# Altium PCB PCB.PcbDoc
Units mil, origin at the board's own origin, x right, y up, seen from the top; angles counter-clockwise.
Board outline 3350 x 2755 mil, 2 copper layers (Top Layer, Bottom Layer); 22 components, 24 nets, 95 pads, 26 vias.
Unrouted connection lines stored in the file: 1.
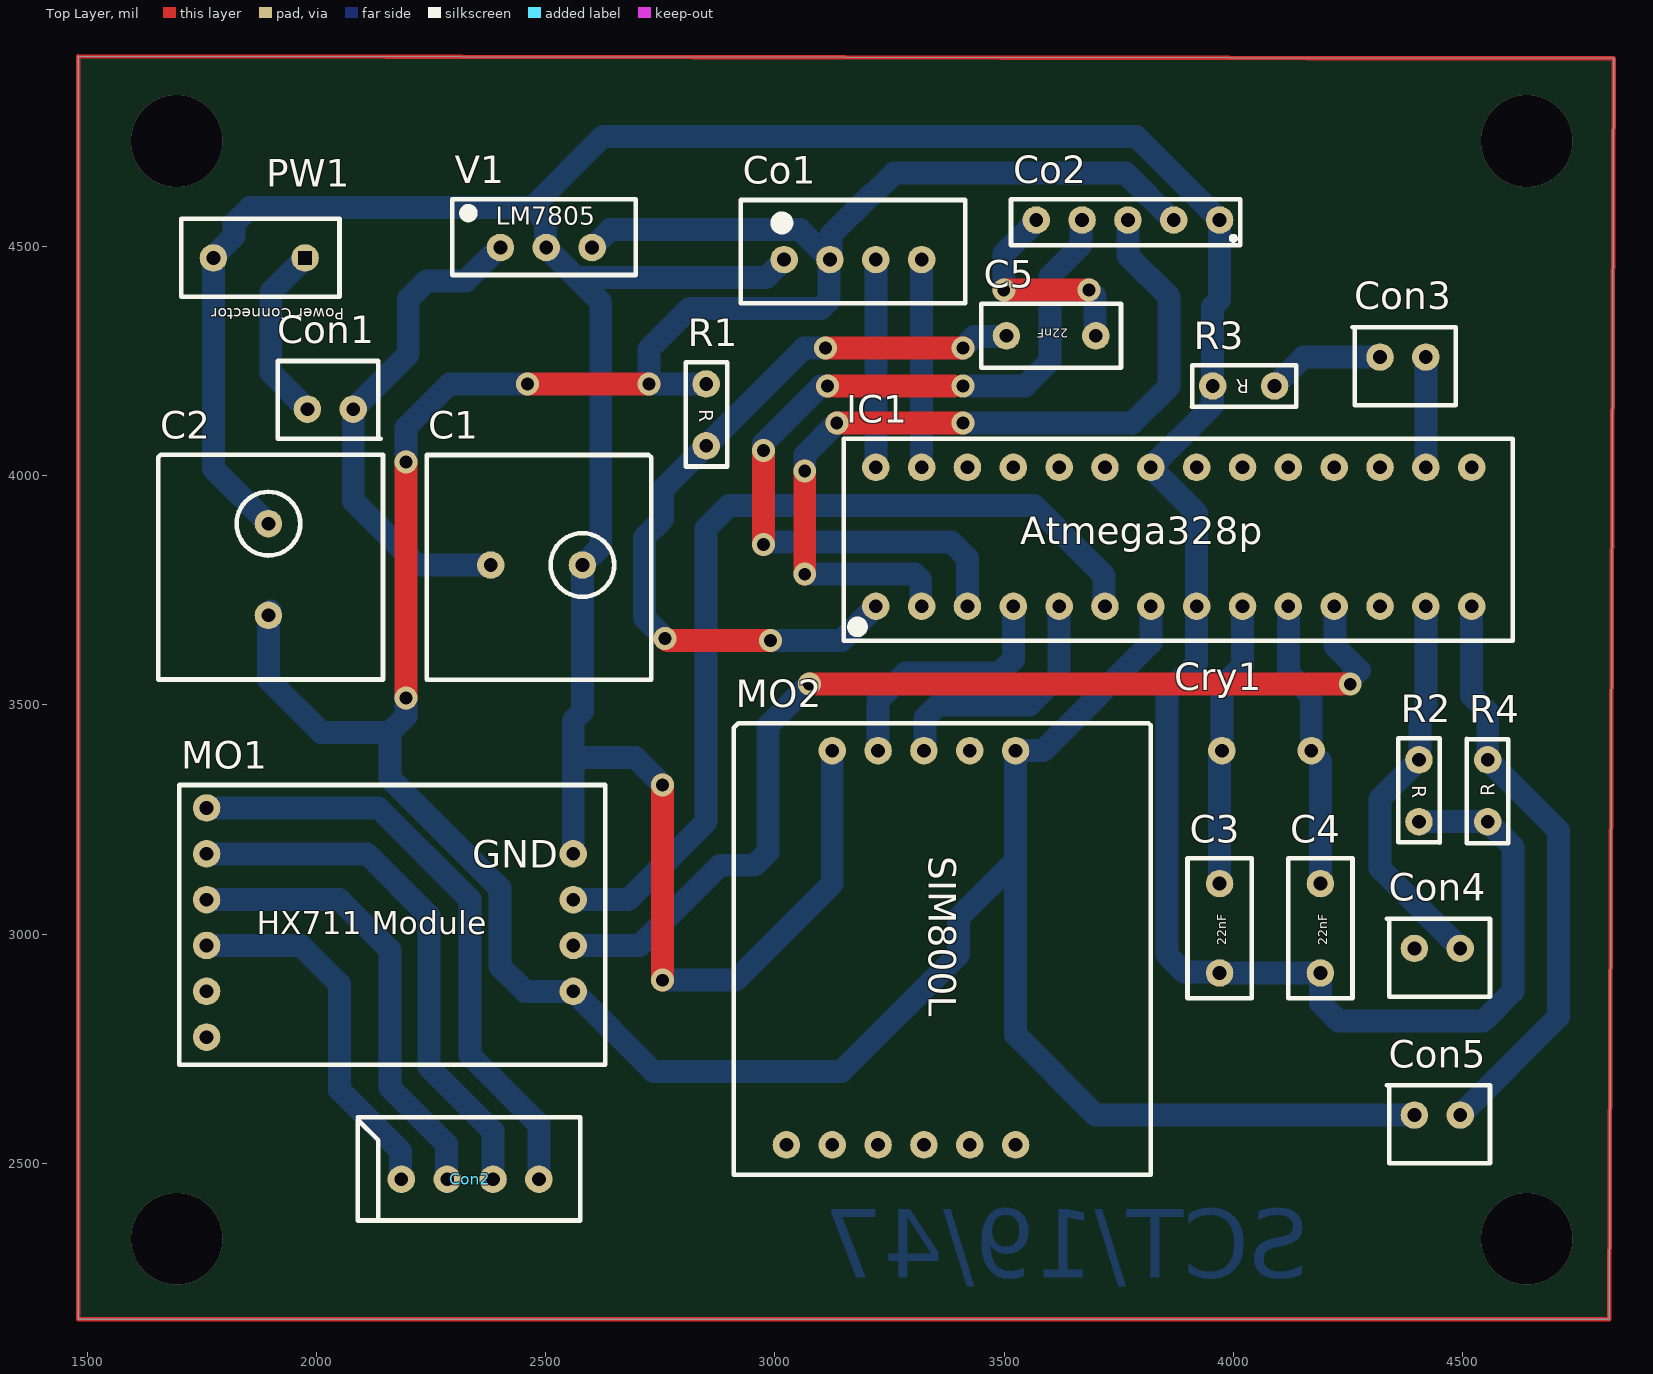
[diagram p0: Top Layer view]
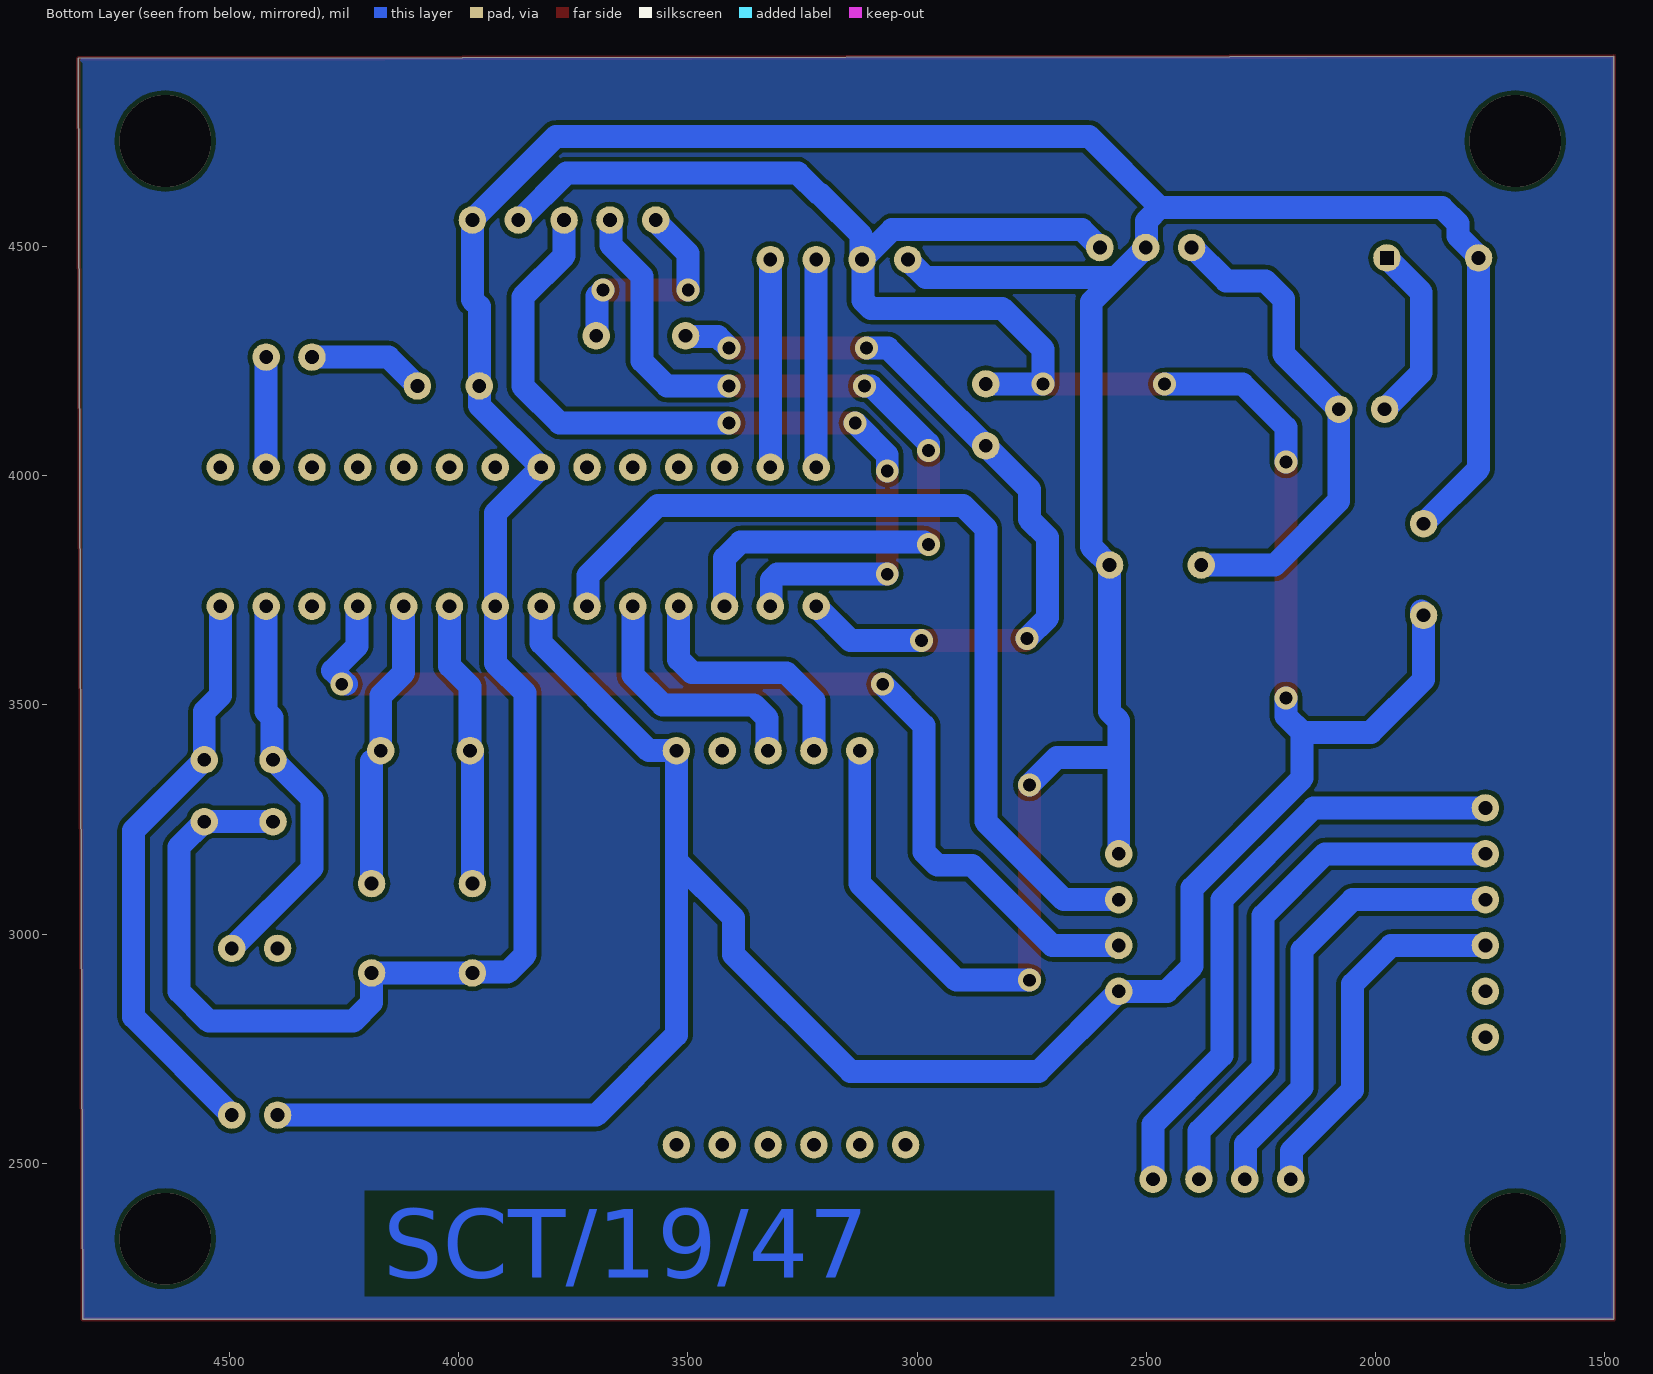
[diagram p1: Bottom Layer view, seen from below]
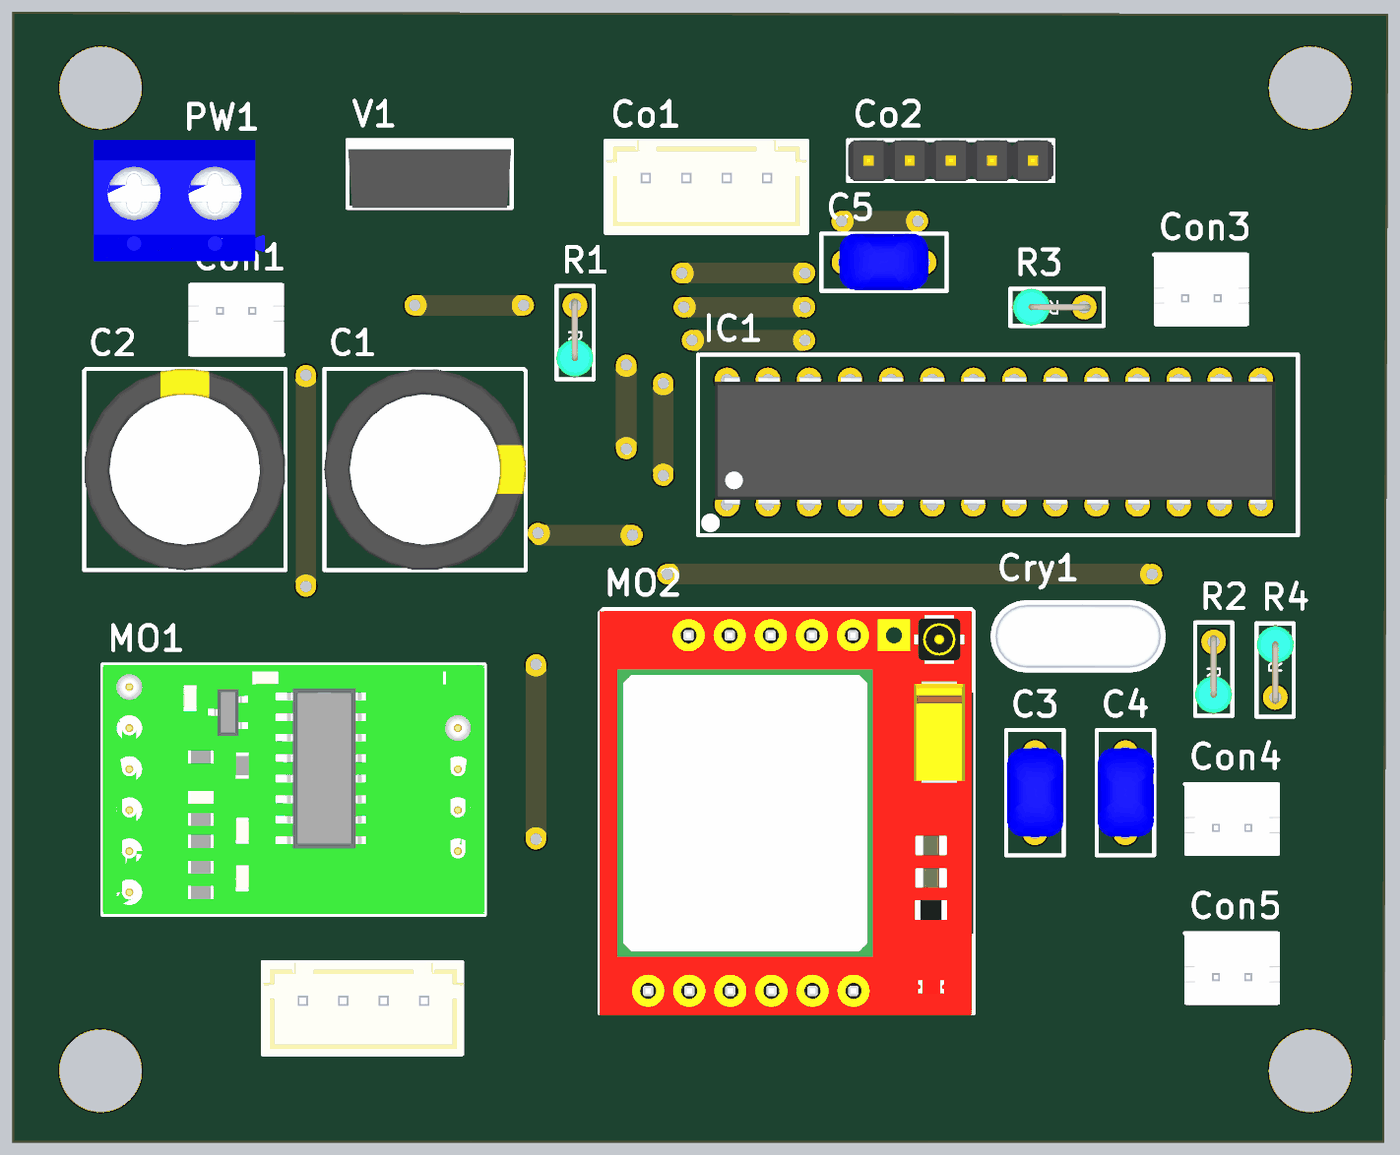
[diagram p2: 3D render of the assembled board from above, using the file's embedded part models]

## Layer stack, top to bottom
Top Solder: solder mask 0.4, Solder Resist, Dk 3.5
Top Layer: signal copper 1.4
Dielectric 1: dielectric 12.6, FR-4, Dk 4.8
Bottom Layer: signal copper 1.4
Bottom Solder: solder mask 0.4, Solder Resist, Dk 3.5

## Board outline
1480,2160 1480,4915 4830,4910 4820,2160

## Design rules (kind name [scope] priority, off if disabled: settings)
Clearance [All] p1: gap=10 ignorepadtopadclearanceinfootprint=FALSE except(0: Arc-Hole Track-Hole SMDPad-Hole THPad-Hole Via-Hole Fill-Hole Poly-Hole Region-Hole Text-Hole)
PolygonConnect [All] p1: connectstyle=Relief reliefconductorwidth=10 reliefentries=4 polygonreliefangle="90 Angle" airgapwidth=10
RoutingVias [All] p1: holewidth=28 width=50 viastyle="Through Hole" minholewidth=28 minwidth=50 maxholewidth=28 maxwidth=50
SolderMaskExpansion [All] p1: expansion=4
Width [All] p1: maxlimit=60 minlimit=40 preferedwidth=50 minimp=50.000000 maximp=50.000000 favimp=50.000000
30 further rules are at their usual default settings.

## Components (designator, comment, footprint, x,y, rotation, side; value= is the part's Value field where it differs from the comment)
C1 "100uF" "100uF Capacitor" 2380,3805 r0 top
C2 "100uF" "100uF Capacitor" 1895,3695.16 r90 top
C3 "22nF" "22nF capacitor" 3970,2915 r90 top
C4 "22nF" "22nF capacitor" 4190,2915 r90 top
C5 "100nF" "22nF capacitor" 3700,4305 r180 top
Co1 "OLED I2C connector" "oled connector i2c" 3020,4471.25 r0 top
Co2 "FTDI" FTDI 3970,4557.64 r180 top
Con1 "2 pin connector" "2 pin  connector" 2080,4145 r180 top
Con2 "4 pin connector" "4 pin connector" 2185,2465 r0 top
Con3 "indicator light" "2 pin  connector" 4320,4258.58 r0 top
Con4 "switch connector" "2 pin  connector" 4395,2968.58 r0 top
Con5 "switch connector" "2 pin  connector" 4395,2605 r0 top
Cry1 "16mhz" "16mhz crystal" 4170,3400 r180 top (schematic designator Cry?)
IC1 "Atmega328p" "Atmega328 TH" 3220,3715 r90 top
MO1 "HX711 Module" "HX711 MODULE" 1760,3275 r0 top
MO2 "SIM800l  GSM Module" "sim800l module" 3525,3400 r270 top
PW1 "Power_connector" Power_connector 1975,4475 r180 top
R1 "10k" "Resistor Vertical" 2850,4200 r270 top
R2 "10k" "Resistor Vertical" 4405,3380 r270 top
R3 "220" "Resistor Vertical" 4090,4195.55 r180 top
R4 "10k" "Resistor Vertical" 4555,3245 r90 top
V1 "LM7805CT" LM7805CT 2401.13,4497.64 r0 top

## Footprints (in the part's own frame and the unit in brackets; to place one, negate y for a bottom-side part, rotate by r counter-clockwise, add the part's x,y. Pads: shape width x height; smd on the part's side, far side on the other; paste and mask are expansions set on the pad)
"2 pin  connector" [mil]
  round 60 hole 30: 1(0,0) 2(100,0)
  silkscreen extent -60,-105 165,65, body extent -61,-109 171,69, height 236
"4 pin connector" [mil]
  round 60 hole 30: 1(0,0) 2(100,0) 3(200,0) 4(300,0)
  silkscreen extent -95,-90 390,135, body extent -94,-93 394,133, height 276
"16mhz crystal" [mil]
  round 60 hole 30: 1(0,0) 2(195,0)
  body extent -119,-82 309,95, height 145
"22nF capacitor" [mil]
  round 60 hole 30: 1(0,0) 2(195,0)
  silkscreen extent -55,-70 250,70, body extent -10,-70 207,68, height 218
"100uF Capacitor" [mil]
  round 60 hole 30: 1(0,0) 2(200,0)
  silkscreen extent -140,-250 350,240, body extent -141,-251 350,241, height 984
"Atmega328 TH" [mil]
  round 60 hole 30: 1(0,0) 2(0,-100) 3(0,-200) 4(0,-300) 5(0,-400) 6(0,-500) 7(0,-600) 8(0,-700) 9(0,-800) 10(0,-900) 11(0,-1000) 12(0,-1100) 13(0,-1200) 14(0,-1300) 15(303.14,-1300) 16(303.14,-1200) 17(303.14,-1100) 18(303.14,-1000) 19(303.14,-900) 20(303.14,-800) 21(303.14,-700) 22(303.14,-600) 23(303.14,-500) 24(303.14,-400) 25(303.14,-300) 26(303.14,-200) 27(303.14,-100) 28(303.14,0)
  silkscreen extent -75,-1390 365,70, body extent -1,-1335 311,30, height 180
FTDI [mil]
  round 60 hole 30: 1(0,0) 2(100,0) 3(200,0) 4(300,0) 5(400,0)
  silkscreen extent -45,-45 455,55, body extent -45,-45 455,55, height 374
"HX711 MODULE" [mil]
  round 60 hole 30: 1(0,0) 2(0,-100) 3(0,-200) 4(0,-300) 5(0,-400) 6(0,-500) 7(800,-100) 8(800,-200) 9(800,-300) 10(800,-400)
  silkscreen extent -60,-560 870,50, body extent -60,-558 870,48, height 409
LM7805CT [mil]
  round 60 hole 30: 1(0,0) 2(100,0) 3(200,0)
  silkscreen extent -105,-60 295,105, body extent -105,-60 295,105, height 900
"oled connector i2c" [mil]
  round 60 hole 30: 1(0,0) 2(100,0) 3(200,0) 4(300,0)
  silkscreen extent -95,-95 395,130, body extent -94,-95 394,131, height 276
Power_connector [mil]
  round 60 hole 30 square: 1(0,0)
  round 60 hole 30: 2(200,0)
  silkscreen extent -75,-85 270,85, body extent -120,-128 297,168, height 394
"Resistor Vertical" [mil]
  round 60 hole 30: 1(0,0) 2(135,0)
  silkscreen extent -47,-45 181,46, body extent -17,-46 177,45, height 501
"sim800l module" [mil]
  round 60 hole 30: 1(0,0) 2(0,-100) 3(0,-200) 4(0,-300) 5(0,-400) 6(860,-500) 7(860,-400) 8(860,-300) 9(860,-200) 10(860,-100) 11(860,0)
  silkscreen extent -60,-615 925,295, body extent -55,-615 929,295, height 238

## Part data
C1 C2: library part "100uF Capacitor"
C3 C4 C5: library part "22nF Capacitor"
Con3 Con4 Con5: library part "2 pin connector"
Cry1: library part "16mhz crystal"
R1 R2 R3 R4: library part "Resistor vertical"

## Via types
v1: diameter 50, hole 28, Top Layer to Bottom Layer, 22 vias
v2: diameter 200, hole 200, Top Layer to Bottom Layer, 4 vias

## Nets (pads, with @x,y where several pads share a name; then routed paths per layer and width w, separated by ;. In a path a pad name is that pad's centre, name@x,y a point inside that pad or via, vN(x,y) a via of type N, cw(c..) or ccw(c..) an arc to the next point about the centre after c; other vN are vias at no path point)
GND: C1.2 C2.2 C3.1 C4.1 Co1.1 Co2.1 IC1.8 IC1.22 MO1.7 MO2.5 PW1.2 R2.2 R3.2 R4.1 V1.2 | length 9542.9
  Top Layer w50: v1(2755,2899.29) v1(2755,3325)
  Bottom Layer w50: C2.2 1775,4015.16 PW1.2 1775,4477.71 1819.64,4522.35 1819.64,4549.64 1855,4585 2469.93,4585 ; MO1.7 2560,3385 ; v1(2755,2899.29) 2914.29,2899.29 3125,3110 MO2.5 ; v1(2755,3325) 2695,3385 2560,3385 ; Co1.1 2981,4432.25 2566.52,4432.25 ; R2.2 R4.1 4610,3190 4610,2875 4545,2810 4230,2810 4190,2850 C4.1 C3.1 3968.09,2916.91 3893.09,2916.91 3855,2955 3855,3525.71 3920,3590.71 IC1.8 3920,3918.14 IC1.22 3955,4153.14 R3.2 3955,4369 3970,4384 Co2.1 3787.64,4740 2624.93,4740 2469.93,4585 ; 2469.93,4585 2499.22,4555.71 2499.22,4499.55 V1.2 2566.52,4432.25 ; 2560,3385 2560,3465 2580,3485 C1.2 2620,3845 2620,4378.77 2566.52,4432.25
NetC1_1: C1.1 Con1.1 V1.1 | length 1098.2
  Bottom Layer w50: C1.1 2220,3805 2080,3945 Con1.1 2200,4265 2200,4385 2240.01,4425.01 2325.8,4425.01 2398.43,4497.64 V1.1 V1.1@2399.22,4495.72
NetC2_1: C2.1 Co1.2 Co2.2 Con4.1 Con5.1 IC1.7 MO1.10 MO2.1 R1.1 V1.3 | length 8006.4
  Top Layer w50: v1(2195,3515) v1(2195,4030) ; v1(2460,4200) v1(2725,4200)
  Bottom Layer w50: C2.1@1900,3705 1895,3700 C2.1 1895,3555 2010,3440 2160,3440 ; v1(2195,3515) 2195,3475 2160,3440 ; v1(2195,4030) 2195,4105 2290,4200 v1(2460,4200) ; V1.3 2640.5,4537 3054.25,4537 Co1.2 ; R1.1 v1(2725,4200) 2725,4275.71 2814.29,4365 3100.71,4365 3118.09,4382.38 3118.09,4469.34 Co1.2 ; IC1.7 3820,3635 3585,3400 MO2.1 3525,3160 ; Co2.2 3867.29,4557.64 3764.93,4660 3260,4660 3215,4615 3212,4615 3121.91,4524.91 3121.91,4473.17 Co1.2 ; Con5.1 3700,2605 3525,2780 3525,3160 ; 2160,3440 2160,3340 2400,3100 2400,2930 2455,2875 MO1.10 2735,2700 3145,2700 3400,2955 3400,3035 3525,3160
NetC3_2: C3.2 Cry1.2 IC1.9 | length 625.7
  Bottom Layer w50: C3.2 3970,3392.29 3975,3397.29 Cry1.2 3975,3540 4020,3585 IC1.9
NetC4_2: C4.2 Cry1.1 IC1.10 | length 603
  Bottom Layer w50: IC1.10 4120,3570 4170,3520 Cry1.1 ; C4.2 4190,3377.29
NetC5_1: C5.1 Co2.5 | length 479.3
  Top Layer w50: v1(3499.29,4405) v1(3685,4405) ; Co2.5@3567.29,4557.64 Co2.5 ; C5.1@3698.09,4306.91 C5.1
  Bottom Layer w50: v1(3499.29,4405) 3499.29,4484.22 3570,4554.93 Co2.5 ; v1(3685,4405) 3698.09,4391.91 3698.09,4306.91 C5.1
NetC5_2: C5.2 IC1.1 R1.2 | length 1744.8
  Top Layer w50: v1(2760,3645) 2765,3640 v1(2990,3640) ; R1.2 R1.2@2851.91,4066.91 ; v1(3110,4278.58) v1(3410,4278.58)
  Bottom Layer w50: v1(2760,3645) 2715,3690 2715,3865 2755,3905 2755,3970 3063.58,4278.58 v1(3110,4278.58) ; v1(2990,3640) 3145,3640 IC1.1 ; v1(3410,4278.58) 3434.51,4303.09 3503.09,4303.09 C5.2
NetCo1_3: Co1.3 IC1.28 | length 453.1
  Bottom Layer w50: IC1.28 Co1.3
NetCo1_4: Co1.4 IC1.27 | length 453.1
  Bottom Layer w50: IC1.27 Co1.4
NetCo2_3: Co2.3 IC1.2 | length 1833.3
  Top Layer w50: v1(3065,3785) v1(3065,4010) ; v1(3135,4115) v1(3410,4115)
  Bottom Layer w50: v1(3065,3785) 3305,3785 3318.09,3771.91 3318.09,3716.91 IC1.2 ; v1(3065,4010) 3065,4045 v1(3135,4115) ; v1(3410,4115) 3780,4115 3860,4195 3860,4390 3770,4480 Co2.3
NetCo2_4: Co2.4 IC1.3 | length 1790.1
  Top Layer w50: v1(2975,3850) v1(2975,4055) ; v1(3115,4195.55) v1@3389.45,4195.55
  Bottom Layer w50: v1(2975,4055) 2975,4070 3100.55,4195.55 v1(3115,4195.55) ; v1@2985,3855 3385,3855 3420,3820 IC1.3 ; v1(3410,4195.55) 3545.55,4195.55 3600,4250 3600,4435 3668.09,4503.09 3668.09,4555.72 Co2.4
NetCon1_2: Con1.2 PW1.1 | length 396.9
  Bottom Layer w50: PW1.1@1975,4472.29 PW1.1 1900,4400 1900,4225 Con1.2
NetCon2_1: Con2.1 MO1.4 | length 806.5
  Bottom Layer w50: MO1.4 1965.71,2975 2050,2890.71 2050,2660 2183.09,2526.91 2183.09,2466.91 Con2.1
NetCon2_2: Con2.2 MO1.3 | length 997.3
  Bottom Layer w50: MO1.3 2050,3075 2160,2965 2160,2665 2283.09,2541.91 2283.09,2466.91 Con2.2
NetCon2_3: Con2.3 MO1.2 | length 1173.9
  Bottom Layer w50: MO1.2 2110,3175 2245,3040 2245,2710 2385,2570 Con2.3
NetCon2_4: Con2.4 MO1.1 | length 1330
  Bottom Layer w50: MO1.1 2135,3275 2335,3075 2335,2735 2485,2585 Con2.4
NetCon3_1: Con3.1 R3.1 | length 256.1
  Bottom Layer w50: R3.1 4153.03,4258.58 Con3.1
NetCon3_2: Con3.2 IC1.16 | length 240.4
  Bottom Layer w50: IC1.16 Con3.2
NetCon4_2: Con4.2 IC1.13 R2.1 | length 860.3
  Bottom Layer w50: IC1.13 4420,3485 4406.91,3471.91 4406.91,3381.91 R2.1 4320,3295 4320,3143.58 Con4.2
NetCon5_2: Con5.2 IC1.14 R4.2 | length 1276.9
  Bottom Layer w50: Con5.2 4709,2819 4709,3226 R4.2 4555,3485 4520,3520 IC1.14
NetIC1_4: IC1.4 MO2.4 | length 557.7
  Bottom Layer w50: MO2.4 3225,3510 3285,3570 3490.71,3570 3520,3599.29 IC1.4
NetIC1_5: IC1.5 MO2.3 | length 553.6
  Bottom Layer w50: MO2.3 3326.91,3401.91 3326.91,3470.71 3356.2,3500 3555,3500 3620,3565 IC1.5
NetIC1_6: IC1.6 MO1.8 | length 2020.3
  Bottom Layer w50: MO1.8 2680,3075 2850,3245 2850,3885 2900,3935 3565,3935 3718.09,3781.91 3718.09,3716.91 IC1.6
NetIC1_11: IC1.11 MO1.9 | length 2293.2
  Top Layer w50: v1(3075,3545) v1@4245,3545 ; IC1.11 IC1.11@4221.91,3713.09
  Bottom Layer w50: MO1.9 2705,2975 2880,3150 2955.71,3150 2985,3179.29 2985,3455 v1(3075,3545) ; IC1.11@4218.09,3716.91 IC1.11 IC1.11@4222.71,3715 ; IC1.11@4221.91,3713.09 4221.91,3628.09 4275,3575 v1@4245,3545
  other v1: 4255,3545
pads on no net: IC1.12 IC1.15 IC1.17 IC1.18 IC1.19 IC1.20 IC1.21 IC1.23 IC1.24 IC1.25 IC1.26 MO1.5 MO1.6 MO2.2 MO2.6 MO2.7 MO2.8 MO2.9 MO2.10 MO2.11
copper on no net: | length 12195
  Top Layer w10: 1480,2160 1480,4915 4830,4910 4820,2160 1480,2160
  other v2: 1695,2335 4640,2335 1695,4730 4640,4730

## Polygon pours and split planes (outlines as drawn)
no net on Bottom Layer (solid, pour order 6): 1480,4915 1480,2160 4820,2160 4820,4900 4830,4910

## Other copper
Bottom Layer:
  text "SCT/19/47" at 4165,2250 h150

## Text inside footprints (layer, text, board x,y; h text height)
C5: Top Overlay "22nF" at 3640,4320 h20 r180
MO1: Top Overlay "GND" at 2340,3145 h60
MO2: Top Overlay "SIM800L" at 3335,3170 h60 r270
PW1: Top Overlay "Power Connector" at 2060,4365 h25 r180
R1: Top Overlay "R" at 2835,4145 h30 r270
R2: Top Overlay "R" at 4390,3325 h30 r270
R3: Top Overlay "R" at 4035,4210.55 h30 r180
R4: Top Overlay "R" at 4570,3300 h30 r90
V1: Top Overlay "LM7805" at 2391.13,4547.64 h40